# EAGLE board DRIVER KRSBI BARU (EAGLE 9.6.2)
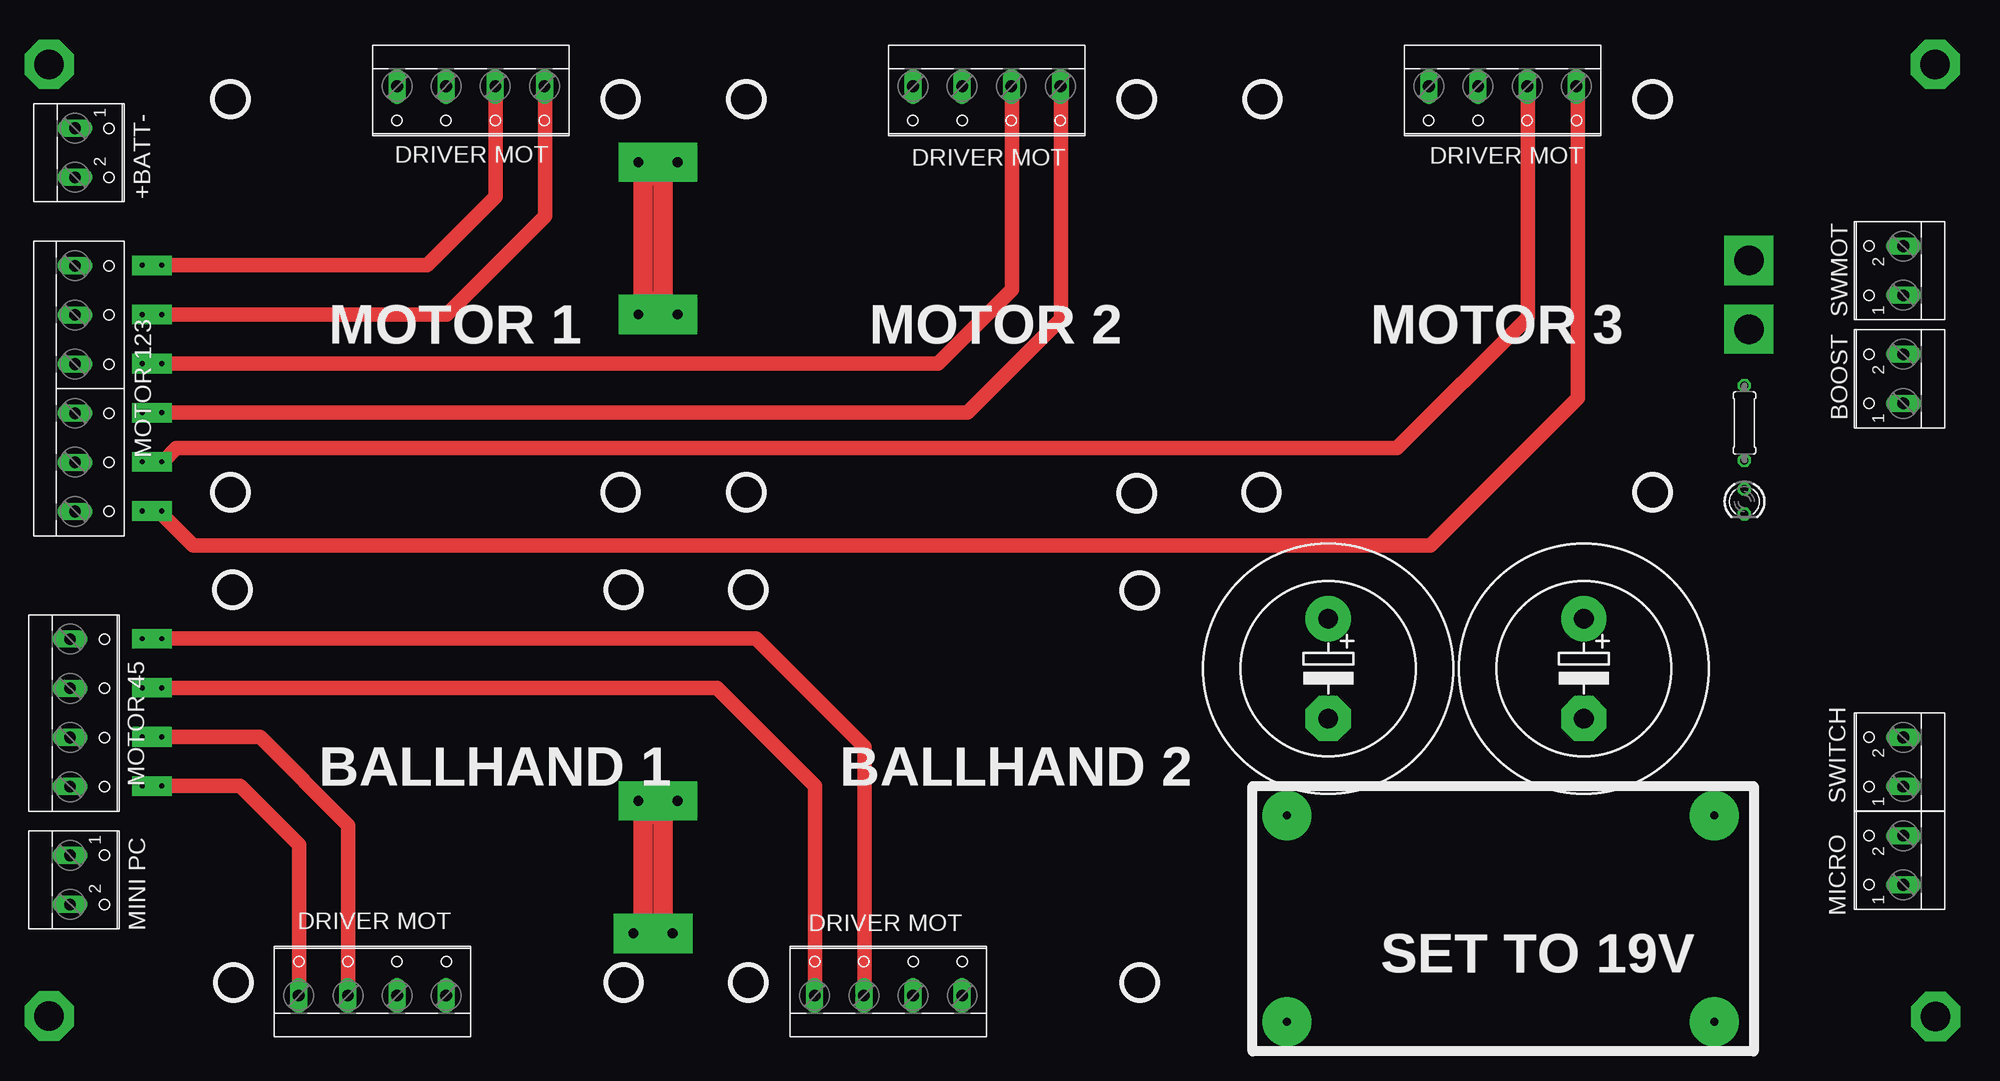
[diagram p0: board, top side]
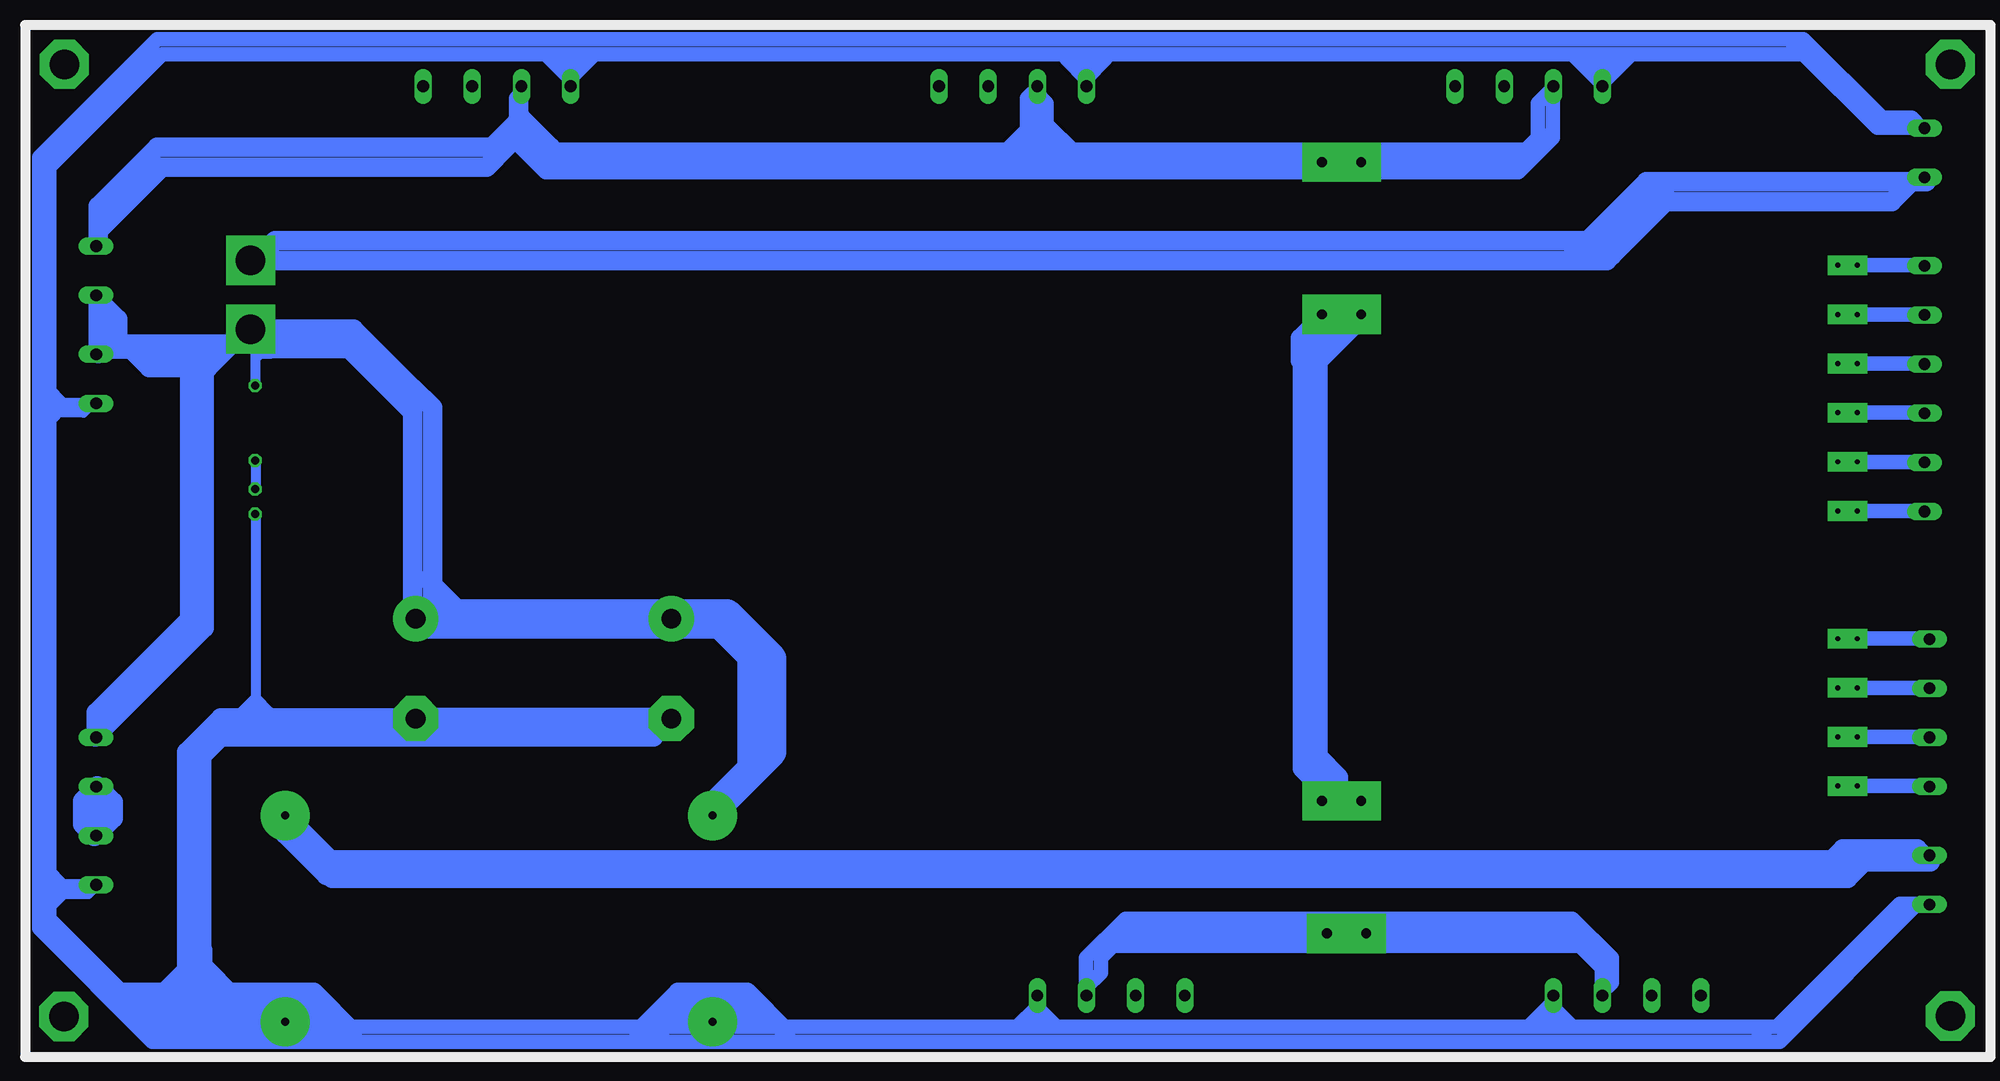
[diagram p1: board, bottom side, seen from below]

No outline drawn. Coordinates in mm, seen from the top.
Copper layers (1*16): Top 0.035mm / dielectric 1.5mm / Bottom 0.035mm
Design rules "default": minimum track width 6mil, minimum drill 0.35mm, track to track 6mil, track to pad 6mil, pad to pad 6mil, via to via 6mil, smd to smd 6mil, copper to edge 40mil, drill to drill 6mil, minimum pad ring 10mil, minimum via ring 8mil, stop-mask expansion 4mil, vias tented up to drill 0mil, thermal gap 10mil

## Footprints (pad centres in the part's own frame; a part is rotated, then mirrored left to right if it is on the bottom)
W237-102 = drill 1.194 long: 1 -2.5,-1.27; 2 2.5,-1.27
W237-6 = drill 1.194 long: 1 -12.5,-1.27; 2 -7.5,-1.27; 3 -2.5,-1.27; 4 2.5,-1.27; 5 7.5,-1.27; 6 12.5,-1.27
W237-4 = drill 1.194 long: 1 -7.5,-1.27; 2 -2.5,-1.27; 3 2.5,-1.27; 4 7.5,-1.27
LED3MM = drill 0.813 octagon: A -1.27,0; K 1.27,0
0207/7 = drill 0.813 octagon: 1 -3.81,0; 2 3.81,0
EB25D = drill 2.007 pad 4.597: + -5.08,0 | drill 2.007 pad 4.597 octagon: - 5.08,0

## Placement (x,y rotation side)
E$3  [W237-102]  199.95,32.45 90 top
E$6  [W237-102]  199.95,71.45 90 top
E$7  [W237-6]  16.45,70.45 270 top
E$8  [W237-4]  15.95,37.45 270 top
E$9  [W237-4]  55.45,99.95 180 top
E$10  [W237-4]  107.95,99.95 180 top
E$11  [W237-4]  160.45,99.95 180 top
E$12  [W237-4]  97.95,9.95 0 top
E$13  [W237-4]  45.45,9.95 0 top
E$14  [W237-102]  199.95,82.45 90 top
E$15  [W237-102]  15.95,20.45 270 top
E$18  [LED3MM]  185.05,58.95 270 top
E$19  [0207/7]  185.05,66.95 90 top
E$21  [EB25D]  142.7,41.95 270 top
E$22  [W237-102]  16.45,94.45 270 top
E$23  [EB25D]  168.7,41.95 270 top
E$24  [W237-102]  199.95,22.45 90 top

## Library data of the parts
E$3 E$6-E$15 E$22 E$24 = con-wago-500
E$18 = led
E$19 = resistor
E$21 E$23 = rcl

## Tracks (layer width: path | path; a pad name or v marks a point on that pad's centre or on a via)
S$1  (via drill 1 pad 4)
  Bottom 1.5: 105.5,92.5 56.5,92.5 53,96 53,101 54.5,99.5 54.5,96 57,93.5 v72.5,93.5 v76.5,93.5 102.5,93.5 | 105.5,92.5 154,92.5 | 154,92.5 156,94.5 158,96.5 158,98 158,100.5 158.5,100 158.5,97.5 158.5,96 158.5,95.5 155.5,92.5 154,92.5 | 105.5,96.5 105.5,97.5 105.5,100.5 104.5,99.5 104.5,97 104.5,96 | 105.5,96.5 105.5,92.5 | 102.5,93.5 105.5,96.5 | 105.5,96.5 108.5,93.5 154.5,93.5 | 102.5,93.5 108,93.5 107.5,94 104,94
  Bottom 2: 158.5,96 159.5,95 | 159.5,95 161.5,93 194.5,93 201,86.5 | 201,86.5 201,85.5 | 201,86.5 201,89 195,95 159.5,95 | 156,94.5 102,94.5 | 54,96 55.5,94.5 100.5,94.5 102,94.5 | 158.5,97.5 161,95 161,94.5 | 158,98 155,95 | 105.5,97.5 109,94 109.5,94 | 104.5,97 102,94.5
S$2
  Bottom 1: 185,63 185,60.5
S$3
  Bottom 1.5: 47,103.5 48.5,103.5
S$4
  Bottom 1.5: 106,100.5 106.5,100 106.5,96
S$5  (via drill 0.5 pad 2)
  Bottom 1.5: 15,83 v22,83
S$6  (via drill 0.5 pad 2)
  Top 1.5: v24,83 51,83 58,90 58,101
S$7  (via drill 0.5 pad 2)
  Bottom 1.5: 15,78 v22,78
S$8  (via drill 0.5 pad 2)
  Top 1.5: v24,78 53,78 63,88 63,101
S$9  (via drill 0.5 pad 2)
  Bottom 1.5: 15,73 v22,73
S$10  (via drill 0.5 pad 2)
  Top 1.5: v24,73 103,73 110.5,80.5 110.5,100.5
S$11  (via drill 0.5 pad 2)
  Bottom 1.5: 15,68 v22,68
S$12  (via drill 0.5 pad 2)
  Top 1.5: v24,68 106,68 115.5,77.5 115.5,100.5
S$13  (via drill 0.5 pad 2)
  Bottom 1.5: 15,63 v22,63
S$14
  Top 1.5: 163,100.9 163,77.7 149.7,64.4 25.5,64.4 24.2,63.1
S$15  (via drill 0.5 pad 2)
  Bottom 1.5: 15,58 v22,58
S$16  (via drill 0.5 pad 2)
  other vias: 24,58
S$17  (via drill 0.5 pad 2)
  Bottom 1.5: 15,45 v22,45
S$18  (via drill 0.5 pad 2)
  other vias: 24,45
S$19  (via drill 0.5 pad 2)
  Bottom 1.5: 15,40 v22,40
S$20  (via drill 0.5 pad 2)
  Top 1.5: v24,40 80.5,40 90.5,30 90.5,9.5
S$21  (via drill 0.5 pad 2)
  Bottom 1.5: 15,35 v22,35
S$22  (via drill 0.5 pad 2)
  Top 1.5: v24,35 34,35 43,26 43,9.5
S$23  (via drill 3 pad 5)
  other vias: 12.55,103.45
S$24  (via drill 3 pad 5)
  other vias: 12.55,6.6
S$25  (via drill 3 pad 5)
  other vias: 204.5,6.55
S$26  (via drill 3 pad 5)
  other vias: 204.45,103.45
S$27  (via drill 0.5 pad 2)
  Bottom 1.5: 15,30 v22,30
S$28  (via drill 0.5 pad 2)
  Top 1.5: v24,30 32,30 38,24 38,9.5
S$29
  Top 1.5: 168.1,101.1 168.1,69.5 153.1,54.5 27.2,54.5 24.1,57.6
S$30
  Top 1.5: 24.5,45 84.5,45 95.5,34 95.5,9.5
S$31
  Bottom 2: 187.2,8.5 190.4,11.7 190.4,13.3
S$32
  Bottom 1.5: 96.5,15.5 52,15.5 | 52,15.5 51,15.5 | 48,11.5 48,9 47,10 47,12.5 51,16.5 51.5,16.5 | 48,11.5 48,13 49,14 51.5,16.5 | 51.5,16.5 95,16.5 | 95,16.5 96.5,16.5 100.5,12.5 100.5,9.5 99,11 99,12.5 | 99,12.5 99,13.5 | 99,12.5 95,16.5 | 52,15.5 48,11.5
  Bottom 2: 49,14 98,14 98.5,13.5
S$33
  Bottom 1: 185,57.5 185,39 | 185,39 185,36.5 | 185,39 186.5,37.5 | 185,39 183.5,37.5
S$34
  Bottom 2: 167.5,51 164,47.5
  Bottom 3: 138.5,27.5 132.5,33.5 132.5,43 137,47.5 164,47.5 168.5,47.5
S$35
  Bottom 2: 182,25.1 177.8,20.9 125.4,20.9
S$36  (via drill 3 pad 5)
  other vias: 185.5,83.5
S$37  (via drill 3 pad 5)
  other vias: 185.5,76.5
S$38
  Bottom 2: 15,91.5 16.5,91.5 | 16.5,91.5 41,91.5 | 41,91.5 49,83.5 | 49,83.5 51.5,83.5 | 51.5,83.5 185,83.5 183,85.5 48.5,85.5 47,84 | 16.5,91.5 18.5,89.5 41.5,89.5 47,84 | 47,84 47.5,83.5 49,83.5 | 41,91.5 43.5,91.5 51.5,83.5
S$39
  Top 2: 73,14.5 73,28.5 75,26.5 75,16.5 73,14.5 | 73,78 73,93.5 75,91.5 75,80 73,78
S$40  (via drill 0.8 pad 5)
  other vias: 182,27
S$41
  Bottom 2: 169,37 142.5,37 144.5,35 167,35 | 167,35 168.5,36.5 | 167,35 188.5,35 190.5,33 190.5,8.9 190.3,8.7
S$42  (via drill 1 pad 4)
  other vias: 76.5,78
S$43
  Bottom 2: 201.1,30 201.1,25.1 | 201.1,25.1 201.2,25 | 201.1,25.1 199.5,26.7 199.5,28.4 201.1,30 | 201.1,30 202.6,28.5 202.6,26.1 201.4,24.9
S$44
  Bottom 1: 201,69 201.5,69 | 201.5,69 204.5,69 | 204.5,69 206.5,69 | 201.5,69 202.5,68 205.5,68 | 204.5,20 201,20 202,19 204.5,19 | 204.5,20 206.5,20 | 204.5,19 206.5,19 | 204.5,20 206,21.5 | 204.5,19 206,17.5 | 204.5,69 206,70.5 | 204.5,68.5 206,67
  Bottom 1.5: 15.5,97 16.5,98 19.5,98 27.5,106 29,106 | 16,97 20,97 27.5,104.5 | 27.5,104.5 29,106 | 29,106 195,106 207,94 207,15.5 195.5,4 32.5,4 | 32.5,4 31,5.5 | 15.9,18 17.7,18 30.2,5.5 31,5.5 | 15.9,18 15.5,18 | 27.5,104.5 45,104.5 | 45,104.5 51,104.5 | 51,104.5 100.5,104.5 | 100.5,104.5 150.5,104.5 | 150.5,104.5 153,104.5 | 153,104.5 155.5,104.5 | 155.5,104.5 194.5,104.5 206,93 206,70.5 206,67 206,21.5 206,17.5 206,16.5 195,5.5 107.5,5.5 | 107.5,5.5 105.5,5.5 | 105.5,5.5 103.5,5.5 | 103.5,5.5 55.5,5.5 | 55.5,5.5 53,5.5 | 53,5.5 51,5.5 | 51,5.5 31,5.5 | 32.5,4 29.9,4 15.9,18 | 45,104.5 48,101.5 51,104.5 | 100.5,102 100.5,104.5 | 100.5,101 100.5,102 | 100.5,102 102.5,104 | 100.5,102 98.5,104 | 153,101.5 153,102 | 153,102 153,104.5 | 153,102 155.5,104.5 | 153,102 150.5,104.5 | 53,8.5 53,8 | 53,8 53,7.5 | 53,7.5 53,5.5 | 53,8 55.5,5.5 | 53,7.5 51,5.5 | 105.5,8 105.5,7.5 | 105.5,7.5 105.5,5.5 | 105.5,7.5 107.5,5.5 | 105.5,7.5 103.5,5.5
S$45  (via drill 1 pad 4)
  other vias: 72.5,78
S$46  (via drill 1 pad 4)
  other vias: 76.5,28.5
S$47  (via drill 1 pad 4)
  other vias: 72.5,28.5
S$48  (via drill 1 pad 4)
  other vias: 72,15
S$49  (via drill 1 pad 4)
  other vias: 76,15
S$50  (via drill 0.5 pad 2)
  other vias: 24,63
S$51
  Bottom 2: 74.9,77.9 78.5,74.3 78.5,31.8 74.8,28.1 74.8,30.9 76.9,33 76.9,73.2 73.4,76.7
S$52
  Bottom 2: 78.7,73.3 78.7,75.6 76.4,77.9
S$53
  Bottom 2: 166.5,35.5 170.9,35.5 169.45,36.95 188.55,36.95 192,33.5 192,11.3 | 192,11.3 192,7.5 194.5,5 175.1,5 179.1,9 190.3,9 | 190.3,9 193.6,5.7 193.6,5.2 191.8,5.2 189.4,7.6 179.9,7.6 179,6.7 | 179,6.7 178.5,6.7 | 179,6.7 189.1,6.7 189.4,6.4 | 190.3,9 198.9,9 | 198.9,9 201.4,11.5 | 198.9,9 197.3,7.4 193.8,7.4 | 193.8,7.4 193.6,7.6 | 193.8,7.4 194.7,6.5 195,6.5 | 194.6,8.7 192,11.3
S$54
  Bottom 1: 185,71 185,73.5 | 185,73.5 185,76 | 185,73.5 184.5,74 183.5,74 | 201.5,74 201,74 189,74
  Bottom 2: 139,28 135,32 135,43 138,46 168,46 169,47 169,68 | 191.7,73.4 191.7,47 201.2,37.5 201.2,35.1 | 201.3,35 201.2,35.1 | 201.2,35.1 190.2,46.1 190.2,72.2 189.8,72.6 | 186.2,76.2 189.8,72.6 | 185,76 183.5,74.5 175.5,74.5 | 175.5,74.5 175,74.5 | 169,70.5 175,76.5 186,76.5 187.5,75 198.2,75 | 169,70.5 169,68 | 175.5,74.5 169,68 | 169,70.5 167,68.5 167,48.5 | 198.2,75 199,75 | 199,75 200,75 201,74 201,79.5 199,77.5 199,75 | 189.8,72.6 195.8,72.6 198.2,75
S$55
  Bottom 2: 182.6,26 177.2,20.6 23,20.6 21.3,22.3 14.6,22.3 15.9,23.6 22.4,23.6 | 22.4,23.6 22.5,23.6 | 22.5,23.6 23.5,23.6 25.8,21.3 176.2,21.3 181.6,26.7 | 22.5,23.6 22.2,23.3 23.9,21.6 23.9,21.4 22.4,22.9 22.4,23.6
S$56
  Bottom 2: 23.6,22.5 179.1,22.5 182.9,26.3
S$57  (via drill 0.8 pad 5)
  other vias: 182,6
S$59  (via drill 0.8 pad 5)
  other vias: 138.5,27
S$60  (via drill 0.8 pad 5)
  other vias: 138.5,6
S$61
  Bottom 2: 131,5 135,9 142,9 146,5 144,5 142,7 | 142,7 141,8 136,8 135,7 | 134,6 135,7 | 135,7 142,7

## Text on the board
tPlace: +BATT- | DRIVER MOT | DRIVER MOT | DRIVER MOT | SWMOT | MOTOR 123 | BOOST | MOTOR 1 | MOTOR 2 | MOTOR 3 | MOTOR 45 | SWITCH | BALLHAND 1 | BALLHAND 2 | MINI PC | MICRO | DRIVER MOT | DRIVER MOT | SET TO 19V